# Altium PCB Untitled1.PcbDoc
Units mil, origin at the board's own origin, x right, y up, seen from the top; angles counter-clockwise.
Board outline 314.96 x 2952.76 mil, 2 copper layers (Top Layer, Top, Bottom Layer, Bottom); 21 components, 1 nets, 60 pads, 0 vias.
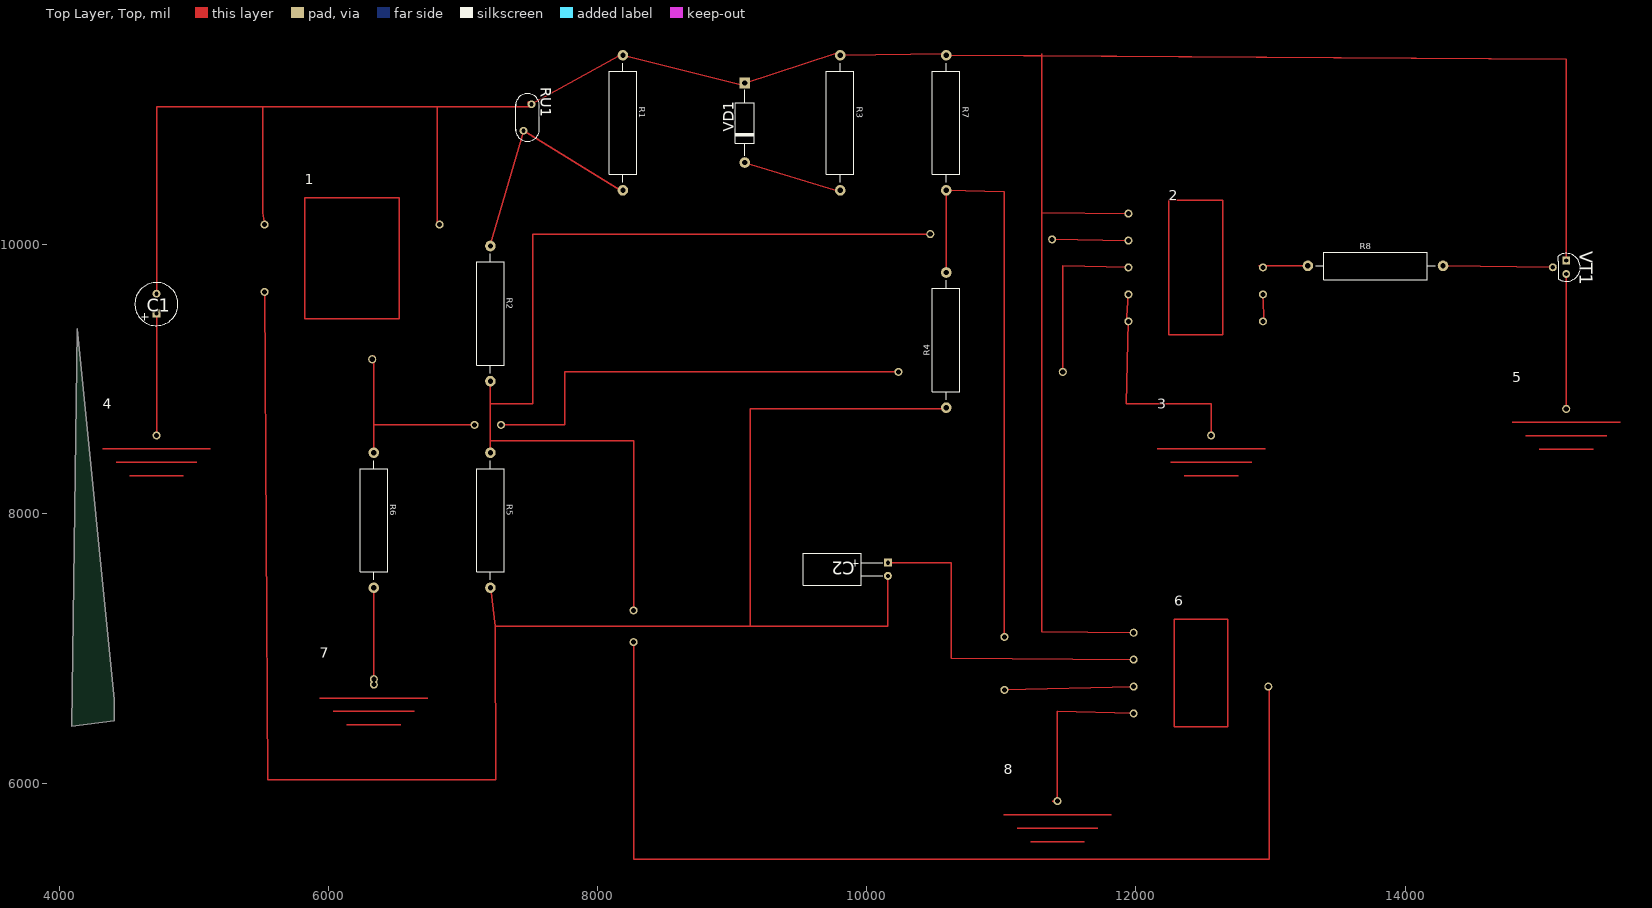
[diagram p0: Top Layer, Top view]
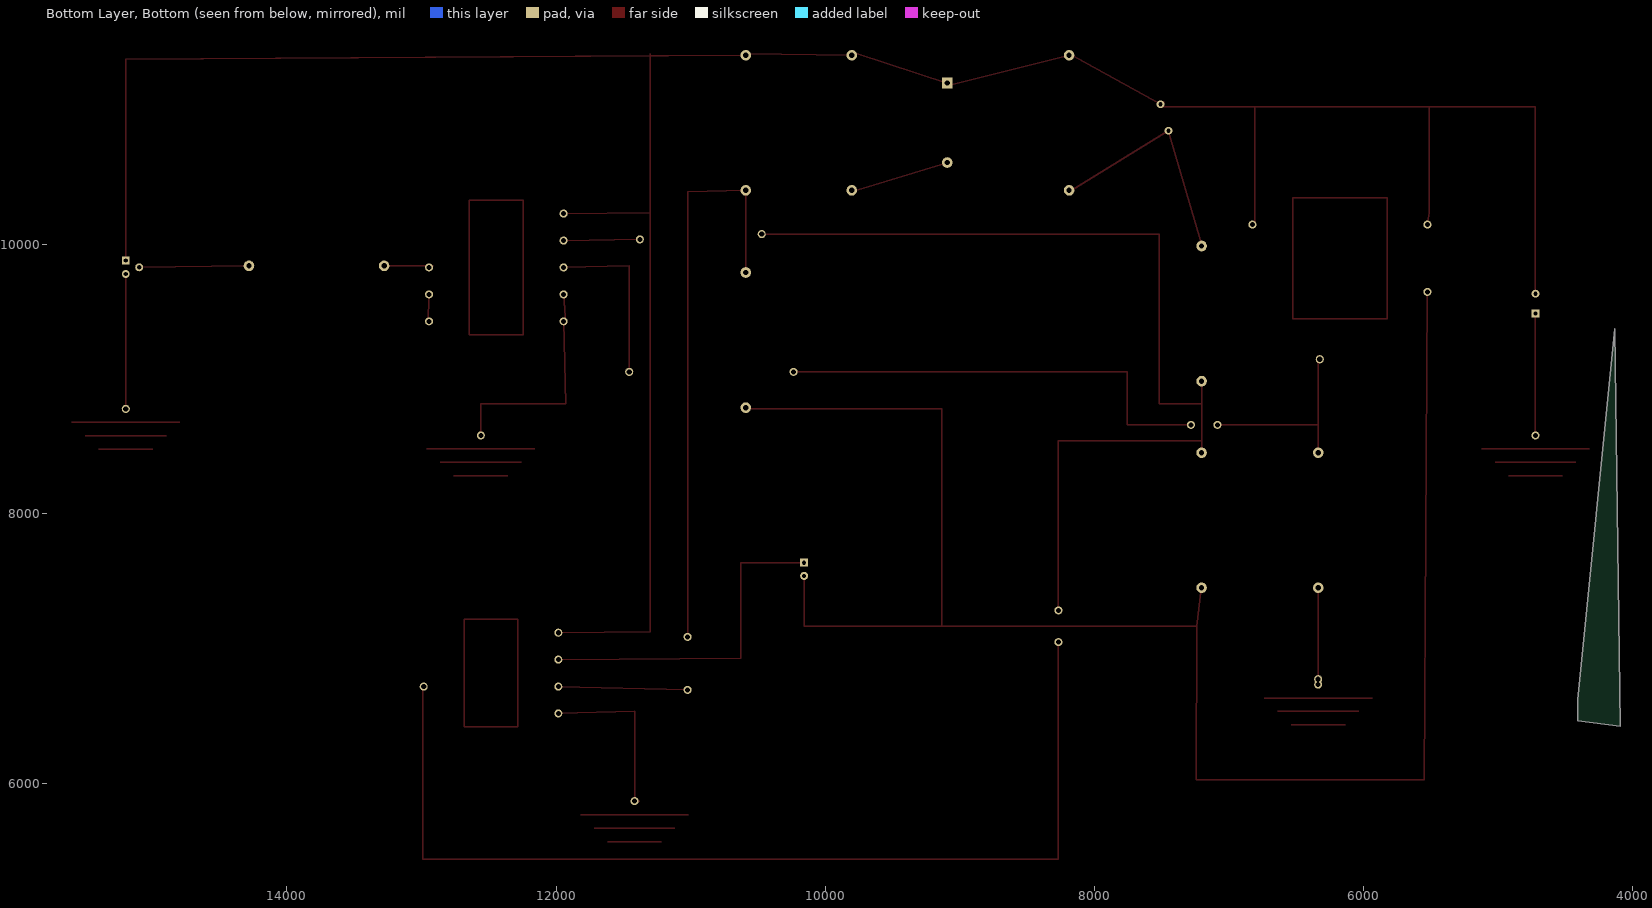
[diagram p1: Bottom Layer, Bottom view, seen from below]

## Layer stack, top to bottom
Top Solder, Top Mask: solder mask 0.4, Solder Resist, Dk 3.5
Top Layer, Top: signal copper 1.4
Dielectric 1: dielectric 12.6, FR-4, Dk 4.8
Bottom Layer, Bottom: signal copper 1.4
Bottom Solder, Bot Mask: solder mask 0.4, Solder Resist, Dk 3.5

## Board outline
4135.12,9375.04 4095.75,6422.28 4410.71,6461.65 4410.71,6619.13

## Design rules (kind name [scope] priority, off if disabled: settings)
Clearance [All] p1: gap=10 ignorepadtopadclearanceinfootprint=FALSE except(0: Arc-Hole Track-Hole SMDPad-Hole THPad-Hole Via-Hole Fill-Hole Poly-Hole Region-Hole Text-Hole; 12: Arc-Arc Arc-Track Arc-THPad Arc-Via Track-Track Track-THPad Track-Via THPad-THPad THPad-Via Via-Via)
PlaneClearance [All] p1: clearance=10
PolygonConnect [All] p1: connectstyle=Relief reliefconductorwidth=10 reliefentries=4 polygonreliefangle="90 Angle" airgapwidth=10
RoutingVias [All] p1: holewidth=28 width=50 viastyle="Through Hole" minholewidth=28 minwidth=50 maxholewidth=28 maxwidth=50
SolderMaskExpansion [All] p1: expansion=4 istentingtop=FALSE
Width [All] p1: maxlimit=10 minlimit=10 preferedwidth=10
29 further rules are at their usual default settings.

## Components (designator, comment, footprint, x,y, rotation, side; value= is the part's Value field where it differs from the comment)
1 "" TGS2620 5826.77,9448.82 r0 top
2 "" K554CA3_K554CA3(Primary) 12244.09,9330.71 r0 top
3 "" GROUND 12559.06,8582.68 r0 top
4 "" GROUND 4724.41,8582.68 r0 top
5 "" GROUND 15196.85,8779.53 r0 top
6 "" КР140УД12_КР140УД12(Primary) 12283.46,6417.32 r0 top
7 "" GROUND 6338.58,6732.28 r0 top
8 "" GROUND 11417.32,5866.14 r0 top
C1 "16B" R50-35-08XX_Primary 4724.41,9488.19 r0 top
C2 "" К50-35-0611-Г_Primary 10157.48,7637.8 r180 top
R1 "11k" PR03(VISHAY) 8188.98,10905.51 r270 top
R2 "5.5k" PR03(VISHAY) 7204.72,9488.19 r270 top
R3 "" PR03(VISHAY) 9803.15,10905.51 r270 top
R4 "12k" PR03(VISHAY) 10590.55,9291.34 r90 top
R5 "47k" PR03(VISHAY) 7204.72,7952.76 r270 top
R6 "47k" PR03(VISHAY) 6338.58,7952.76 r270 top
R7 "47k" PR03(VISHAY) 10590.55,10905.51 r270 top
R8 "3k" PR03(VISHAY) 13779.53,9842.52 r0 top
RU1 "4.7k" S07K230 7480.31,10944.88 r270 top
VD1 "" DO-7_1N34(Primary) 9094.49,10905.51 r90 top
VT1 "" TO-92-1 15196.85,9881.89 r270 top

## Footprints (in the part's own frame and the unit in brackets; to place one, negate y for a bottom-side part, rotate by r counter-clockwise, add the part's x,y. Pads: shape width x height; smd on the part's side, far side on the other; paste and mask are expansions set on the pad)
DO-7_1N34(Primary) [mm]
  rect 2x2 hole 1: A(7.5,0)
  round 2 hole 1: K(-7.5,0)
  silkscreen extent -6.25,-1.8 6.25,1.8
GROUND [mil]
  round 60 hole 38: 1(0,0)
  Top Layer, Top lines w10: -400,-100 400,-100 ; -300,-200 300,-200 ; -200,-300 200,-300
K554CA3_K554CA3(Primary) [mil]
  round 60 hole 38: 1(-300,300) 2(-300,500) 3(-300,700) 4(-300,100) 5(700,300) 6(700,100) 7(700,500) 8(-300,900)
  Top Layer, Top lines w10: 0,0 300,0 400,0 400,1000 0,1000 0,0
PR03(VISHAY) [mm]
  round 2 hole 1: 1(-12.75,0) 2(12.75,0)
  silkscreen extent -11.25,-2.6 11.25,2.6
R50-35-08XX_Primary [mm]
  rect 1.5x1.5 hole 0.8: 1(0,0)
  round 1.5 hole 0.8: 2(0,3.75)
  silkscreen extent -4.08,-2.27 4.04,5.85
S07K230 [mm]
  round 1.5 hole 0.8: 1(-2.5,0.75) 2(2.5,-0.75)
  silkscreen extent -4.5,-2.25 4.5,2.25
TGS2620 [mil]
  round 60 hole 38: 1(-300,700) 2(-300,200) 3(500,-300) 4(1000,700)
  Top Layer, Top lines w10: 0,0 700,0 700,900 0,900 0,0
TO-92-1 [mm]
  rect 1.5x1.5 hole 0.8: 1(0,0)
  round 1.5 hole 0.8: 2(1.27,-2.54) 3(2.54,0)
  silkscreen extent -1.35,-1.5 3.92,2.65
К50-35-0611-Г_Primary [mm]
  rect 1.5x1.5 hole 0.8: 1(0,0)
  round 1.5 hole 0.8: 2(0,2.5)
  silkscreen extent 1,-1.75 16,4.25
КР140УД12_КР140УД12(Primary) [mil]
  round 60 hole 38: 1(-300,500) 2(-300,300) 3(-300,100) 4(700,300) 5(-300,700)
  Top Layer, Top lines w10: 0,0 400,0 400,800 0,800 0,0

## Free pads (board coordinates)
  round 60 hole 38: 0(6338.58,6771.65) 0(7086.61,8661.42) 0(7283.46,8661.42) 0(8267.72,7047.24) 0(8267.72,7283.46) 0(10236.22,9055.12) 0(10472.44,10078.74) 0(11023.62,6692.91) 0(11023.62,7086.61) 0(11377.95,10039.37) 0(11456.69,9055.12)

## Nets (pads, with @x,y where several pads share a name; then routed paths per layer and width w, separated by ;. In a path a pad name is that pad's centre, name@x,y a point inside that pad or via, vN(x,y) a via of type N, cw(c..) or ccw(c..) an arc to the next point about the centre after c; other vN are vias at no path point)
NET00010: 7.1
pads on no net: 1.1 1.2 1.3 1.4 2.1 2.2 2.3 2.4 2.5 2.6 2.7 2.8 3.1 4.1 5.1 6.1 6.2 6.3 6.4 6.5 8.1 C1.1 C1.2 C2.1 C2.2 R1.1 R1.2 R2.1 R2.2 R3.1 R3.2 R4.1 R4.2 R5.1 R5.2 R6.1 R6.2 R7.1 R7.2 R8.1 R8.2 RU1.1 RU1.2 VD1.A VD1.K VT1.1 VT1.2 VT1.3
copper on no net: | length 167892.4
  Top Layer, Top w10: 6338.58,6732.28 6338.58,6771.65 6338.58,7450.79 6338.58,7086.61 ; 7086.61,8661.42 6338.58,8661.42 ; 7204.72,10000 7450.79,10846.46 ; 7283.46,8661.42 7755.91,8661.42 7755.91,9055.12 10236.22,9055.12 ; 8188.98,11407.48 9094.49,11181.1 ; 8267.72,7047.24 8267.72,5433.07 12992.13,5433.07 12992.13,6732.28 12983.46,6717.32 ; 8267.72,7283.46 8267.72,8543.31 7204.72,8543.31 ; 9094.49,10610.24 9803.15,10393.7 ; 9094.49,11200.79 9763.78,11417.32 9803.15,11417.32 ; 9133.86,7165.35 9133.86,8779.53 10590.55,8779.53 ; 9803.15,11407.48 10590.55,11417.32 ; 10157.48,7637.8 10629.92,7637.8 10629.92,6929.13 11983.46,6917.32 ; 11023.62,6692.91 11983.46,6717.32 ; 11377.95,5866.14 11417.32,5866.14 11417.32,6535.43 11983.46,6517.32 ; 11377.95,10039.37 11944.09,10030.71 ; 11456.69,9055.12 11456.69,9842.52 11944.09,9830.71 ; 11929.13,9409.45 11944.09,9630.71 ; 11944.09,9430.71 11929.13,8818.9 12559.06,8818.9 12559.06,8582.68 ; 12913.39,9842.52 13277.56,9842.52 ; 12944.09,9630.71 12952.76,9409.45 ; 14291.34,9842.52 15096.85,9831.89 ; 15196.85,8779.53 15196.85,9781.89 ; 4724.41,9635.83 4724.41,11023.62 ; 4724.41,9635.83 4724.41,11023.62 ; 4724.41,9635.83 4724.41,11023.62 ; 4724.41,9635.83 4724.41,11023.62 ; 4724.41,9635.83 4724.41,11023.62 ; 4724.41,9635.83 4724.41,11023.62 ; 4724.41,9635.83 4724.41,11023.62 ; 4724.41,11023.62 5511.81,11023.62 ; 5511.81,10236.22 5511.81,11023.62 ; 5511.81,10236.22 5511.81,11023.62 ; 5511.81,10236.22 5511.81,11023.62 ; 5511.81,10236.22 5511.81,11023.62 ; 5511.81,10236.22 5511.81,11023.62 ; 5511.81,10236.22 5511.81,11023.62 ; 5511.81,10236.22 5511.81,11023.62 ; 5511.81,10236.22 5526.77,10148.82 ; 5511.81,10236.22 5526.77,10148.82 ; 5511.81,10236.22 5526.77,10148.82 ; 5511.81,10236.22 5526.77,10148.82 ; 5511.81,10236.22 5526.77,10148.82 ; 5511.81,10236.22 5526.77,10148.82 ; 5511.81,11023.62 6811.02,11023.62 ; 5511.81,11023.62 6771.65,11023.62 ; 5526.77,9648.82 5551.18,6023.62 ; 5526.77,9648.82 5551.18,6023.62 ; 5526.77,9648.82 5551.18,6023.62 ; 5526.77,9648.82 5551.18,6023.62 ; 5526.77,10148.82 5551.18,10157.48 ; 5526.77,10148.82 5551.18,10157.48 ; 5526.77,10148.82 5551.18,10157.48 ; 5526.77,10148.82 5551.18,10157.48 ; 5526.77,10148.82 5551.18,10157.48 ; 5526.77,10148.82 5551.18,10157.48 ; 5526.77,10148.82 5551.18,10157.48 ; 5551.18,6023.62 7244.09,6023.62 ; 5551.18,6023.62 7244.09,6023.62 ; 6326.77,9148.82 6338.58,9173.23 ; 6326.77,9148.82 6338.58,9173.23 ; 6326.77,9148.82 6338.58,9173.23 ; 6338.58,8464.57 6338.58,9173.23 ; 6338.58,8464.57 6338.58,9173.23 ; 6338.58,8464.57 6338.58,8454.72 6338.58,8661.42 ; 6338.58,8661.42 6338.58,9173.23 ; 6771.65,11023.62 7519.69,11023.62 ; 6771.65,11023.62 7519.69,11023.62 ; 6811.02,10157.48 6811.02,11023.62 ; 6811.02,10157.48 6811.02,11023.62 ; 6811.02,10157.48 6826.77,10148.82 ; 6811.02,10157.48 6826.77,10148.82 ; 6811.02,10157.48 6826.77,10148.82 ; 6811.02,10157.48 6826.77,10148.82 ; 6811.02,10157.48 6826.77,10148.82 ; 6811.02,11023.62 7519.69,11023.62 ; 7204.72,7480.31 7238.82,7164.9 ; 7204.72,7480.31 7238.82,7164.9 ; 7204.72,7480.31 7238.82,7164.9 ; 7204.72,8464.57 7204.72,9015.75 ; 7204.72,8464.57 7204.72,8543.31 ; 7204.72,8464.57 7204.72,8661.42 7204.72,9015.75 ; 7204.72,8543.31 7204.72,8818.9 ; 7204.72,8818.9 7519.69,8818.9 ; 7204.72,8818.9 7519.69,8818.9 ; 7204.72,8818.9 7204.72,9015.75 ; 7204.72,8818.9 7204.72,9015.75 ; 7238.82,7164.9 8267.72,7165.06 10157.48,7165.35 ; 7238.82,7164.9 10157.48,7165.35 ; 7238.82,7164.9 7244.09,6023.62 ; 7238.82,7164.9 7244.09,6023.62 ; 7450.79,10846.46 8188.98,10393.7 7450.79,10846.46 ; 7480.31,11062.99 7509.84,11043.31 ; 7480.31,11062.99 7509.84,11043.31 ; 7480.31,11062.99 7509.84,11043.31 ; 7480.31,11062.99 7509.84,11043.31 ; 7509.84,11043.31 8188.98,11417.32 7509.84,11043.31 ; 7509.84,11043.31 7519.69,11023.62 ; 7509.84,11043.31 7519.69,11023.62 ; 7509.84,11043.31 7519.69,11023.62 ; 7519.69,8818.9 7519.69,10078.74 ; 7519.69,8818.9 7519.69,10078.74 ; 7519.69,10078.74 10472.44,10078.74 7519.69,10078.74 ; 10157.48,7165.35 10157.48,7539.37 10157.48,7165.35 ; 10590.55,9803.15 10590.55,10073.61 10590.55,10403.54 ; 10590.55,9803.15 10590.55,10403.54 ; 10590.55,9803.15 10590.55,10403.54 ; 10590.55,10403.54 11023.62,10393.7 ; 10590.55,10403.54 11023.62,10393.7 ; 10590.55,10403.54 11023.62,10393.7 ; 10590.55,11407.48 15196.85,11377.95 ; 10590.55,11407.48 11299.21,11402.94 ; 10590.55,11407.48 11299.21,11402.94 ; 10590.55,11407.48 11299.21,11402.94 ; 10590.55,11407.48 11299.21,11402.94 ; 11023.62,7086.61 11023.62,10393.7 ; 11023.62,7086.61 11023.62,10054.78 11023.62,10393.7 ; 11023.62,7086.61 11023.62,9055.12 11023.62,10393.7 ; 11299.21,7125.98 11983.46,7117.32 ; 11299.21,7125.98 11983.46,7117.32 ; 11299.21,7125.98 11983.46,7117.32 ; 11299.21,7125.98 11299.21,10042.79 11299.21,10236.22 ; 11299.21,7125.98 11299.21,10236.22 ; 11299.21,7125.98 11299.21,9055.12 11299.21,10236.22 ; 11299.21,10236.22 11944.09,10230.71 ; 11299.21,10236.22 11944.09,10230.71 ; 11299.21,10236.22 11944.09,10230.71 ; 11299.21,10236.22 11944.09,10230.71 ; 11299.21,10236.22 11299.21,11402.94 ; 11299.21,10236.22 11299.21,11402.94 ; 11299.21,10236.22 11299.21,11402.94 ; 11299.21,10236.22 11299.21,11402.94 ; 11299.21,11402.94 15196.85,11377.95 ; 11299.21,11402.94 15196.85,11377.95 ; 11299.21,11402.94 15196.85,11377.95 ; 11299.21,11402.94 15196.85,11377.95 ; 11299.21,11402.94 11299.21,11417.32 ; 11299.21,11402.94 11299.21,11417.32 ; 11299.21,11402.94 11299.21,11417.32 ; 11299.21,11402.94 11299.21,11417.32 ; 15196.85,9881.89 15196.85,11377.95 ; 15196.85,9881.89 15196.85,11377.95 ; 15196.85,9881.89 15196.85,11377.95 ; 15196.85,9881.89 15196.85,11377.95 ; 15196.85,9881.89 15196.85,11377.95 ; 4724.41,8582.68 4724.41,9488.19 4724.41,8582.68 ; 5826.77,9448.82 6410.76,9448.82 6526.77,9448.82 6526.77,9955.05 6526.77,10348.82 5826.77,10348.82 5826.77,9448.82

## Text inside footprints (layer, text, board x,y; h text height)
VT1: Mechanical 1, Top Assy "C" at 15227.95,9791.73 h12.3 r270; Mechanical 1, Top Assy "E" at 15227.95,9909.84 h12.3 r270; Mechanical 1, Top Assy "BASE" at 15147.64,9852.36 h12.3 r270